# EAGLE board taser_ckt (EAGLE 9.6.2)
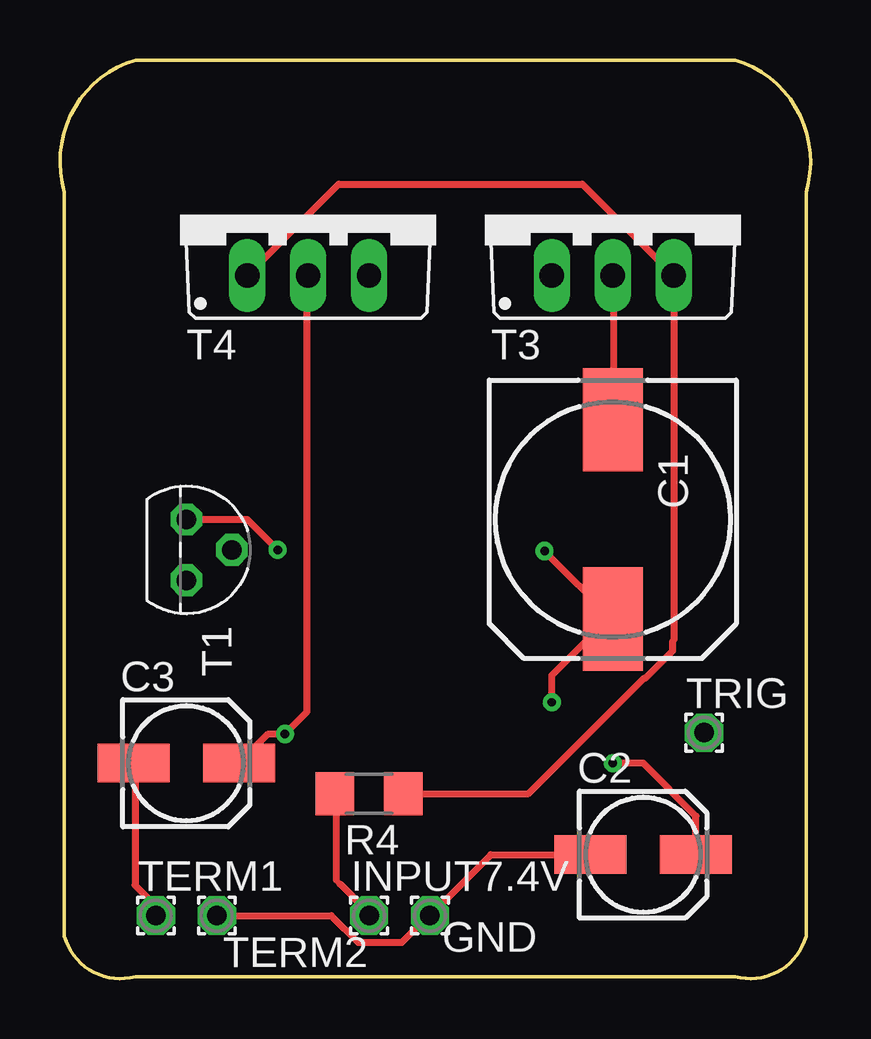
[diagram p0: board, top side]
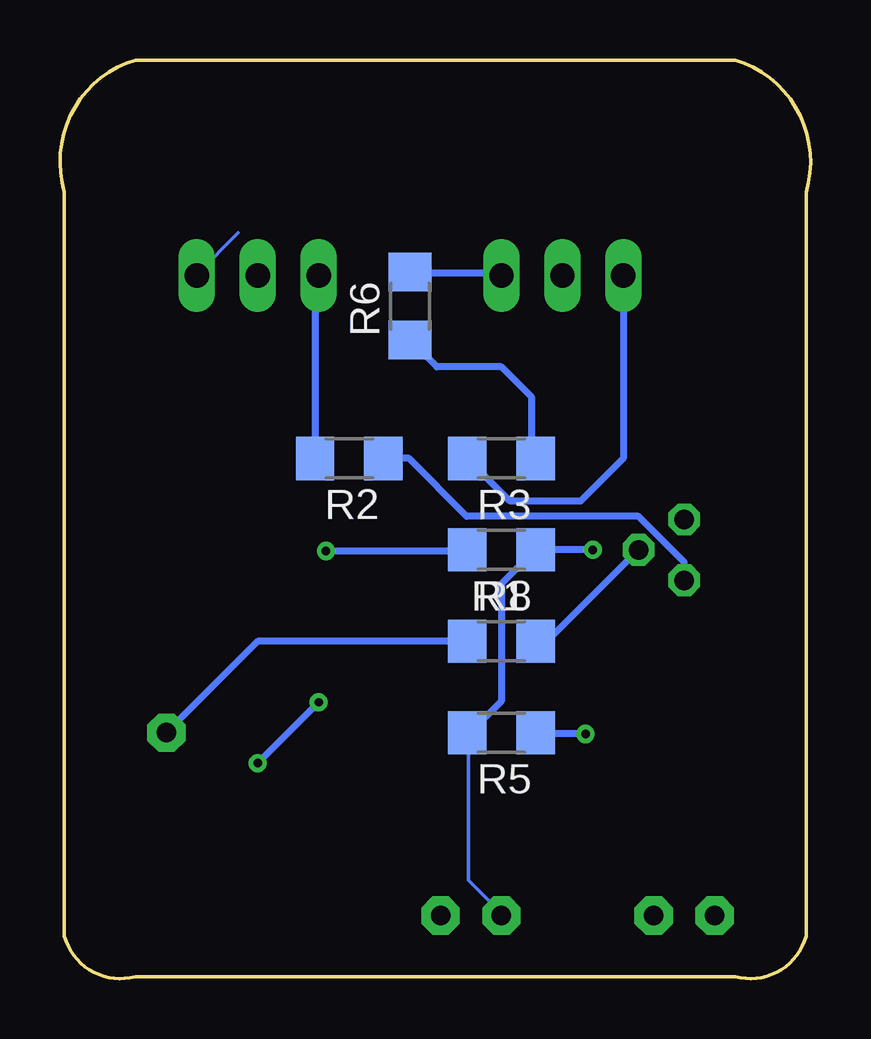
[diagram p1: board, bottom side, seen from below]

Size 31.29 x 38.28 mm. Coordinates in mm from the lower left corner, seen from the top.
Outline: 0.19,1.78 arc90 3.15,0.09 28.15,0.09 arc90 31.11,1.78 31.11,32.78 arc90 28.15,38.28 3.15,38.28 arc90 0.19,32.78 0.19,1.78
Copper layers (1*16): Top 0.035mm / dielectric 1.5mm / Bottom 0.035mm
Design rules "default": minimum track width 6mil, minimum drill 0.35mm, track to track 6mil, track to pad 6mil, pad to pad 6mil, via to via 6mil, smd to smd 6mil, copper to edge 40mil, drill to drill 6mil, minimum pad ring 10mil, minimum via ring 8mil, stop-mask expansion 4mil, vias tented up to drill 0mil, thermal gap 10mil

## Footprints (pad centres in the part's own frame; a part is rotated, then mirrored left to right if it is on the bottom)
150CLZ-1014 = smd 4.3 x 2.5: + 4.15,0; - -4.15,0
153CLV-0505 = smd 3 x 1.6: + 2.2,0; - -2.2,0
1,6/0,8 = drill 0.813 pad 1.6 octagon: 1 0,0
R1206 = smd 1.6 x 1.803: 1 -1.422,0; 2 1.422,0
TO92 = drill 0.813 octagon: 1 1.27,0; 2 0,1.905; 3 -1.27,0
TO220BV = drill 1.016 long: 1 -2.54,-2.54; 2 0,-2.54; 3 2.54,-2.54

## Placement (x,y rotation side)
C1  [150CLZ-1014]  23.05,19.14 270 top
C2  [153CLV-0505]  24.32,5.17 0 top
C3  [153CLV-0505]  5.27,8.98 0 top
GND  [1,6/0,8]  15.43,2.63 0 top
INPUT7.4V  [1,6/0,8]  12.89,2.63 0 top
R1  [R1206]  12.89,14.06 0 bottom
R2  [R1206]  19.24,21.68 180 bottom
R3  [R1206]  12.89,21.68 180 bottom
R4  [R1206]  12.89,7.71 180 top
R5  [R1206]  12.89,10.25 180 bottom
R6  [R1206]  16.7,28.03 90 bottom
R8  [R1206]  12.89,17.87 180 bottom
T1  BC547  [TO92]  5.27,17.87 270 top
T3  2SC1306  [TO220BV]  23.05,31.84 0 top
T4  2SC1306  [TO220BV]  10.35,31.84 0 top
TERM1  [1,6/0,8]  4,2.63 0 top
TERM2  [1,6/0,8]  6.54,2.63 0 top
TRIG  [1,6/0,8]  26.86,10.25 0 top

## Library data of the parts
C1-C3 = rcl; SPICEPREFIX: C
GND INPUT7.4V TERM1 TERM2 TRIG = wirepad
R1-R6 R8 = rcl; SPICEPREFIX: R
T1 = transistor
T3 T4 = transistor-neu-to92

## Nets
GND: C2.- GND.1 TERM2.1
N$1: R2.2 T3.1
N$2: C1.+ C2.+ R8.2
N$3: R2.1 T1.1
N$4: C1.- T3.2
N$5: R3.2 R4.1 T3.3 T4.1
N$7: C3.+ R5.1 T4.2
N$8: R6.2 T4.3
N$9: R3.1 R6.1
N$10: C3.- TERM1.1
N$11: R1.1 TRIG.1
N$12: R1.2 T1.2
VCC: INPUT7.4V.1 R4.2 R5.2 R8.1 T1.3

## Tracks (layer width: path | path; a pad name or v marks a point on that pad's centre or on a via)
GND
  Top 0.152: 21.78,5.17 C2.- | 15.32,2.57 GND.1
  Top 0.3: TERM2.1 11.31,2.63 12.43,1.51 14.26,1.51 15.32,2.57 | GND.1 17.97,5.17 21.78,5.17
N$1
  Bottom 0.3: T3.1 20.66,29.14 R2.2
N$2  (via drill 0.35)
  Top 0.152: 22.94,15.07 C1.+
  Top 0.3: C2.+ 26.52,6.78 24.32,8.98 v23.05,8.98 | v20.51,11.52 20.51,12.63 22.94,15.07 | v20.2,17.81 23.03,14.99 C1.+
  Bottom 0.3: v23.05,8.98 v20.51,11.52 | R8.2 14.36,17.81 v20.2,17.81
N$3
  Bottom 0.3: T1.1 5.27,17.36 7.17,19.26 14.33,19.26 16.75,21.68 R2.1
N$4
  Top 0.152: 23.1,29.24 T3.2
  Top 0.3: C1.- 23.1,23.34 23.1,29.24
N$5
  Top 0.3: T4.1 11.62,33.11 21.78,33.11 T3.3 25.59,14.11 25.54,14.06 25.54,13.65 24.42,12.53 24.37,12.53 19.54,7.71 R4.1
  Bottom 0.152: 14.26,21.62 R3.2 14.41,21.78 14.41,22.23 | 7.86,29.24 T4.1 | 23.86,31.07 25.54,29.4 T3.3
  Bottom 0.3: T4.1 7.81,21.68 9.58,19.9 12.53,19.9 14.26,21.62
N$7  (via drill 0.35)
  Top 0.152: 10.3,29.24 T4.2
  Top 0.3: C3.+ 8.69,10.19 v9.38,10.19 10.3,11.11 10.3,29.24
  Bottom 0.3: v9.38,10.19 11.41,10.19 R5.1
N$8
  Bottom 0.152: 16.7,29.4 R6.2 | 12.89,29.4 T4.3
  Bottom 0.3: T4.3 12.99,29.4 16.7,29.4
N$9
  Bottom 0.152: 11.97,21.78 11.51,21.78 R3.1 | 16.7,26.5 R6.1
  Bottom 0.3: R3.1 11.62,21.83 11.62,24.22 12.89,25.49 15.58,25.49 R6.1
N$10
  Top 0.3: C3.- 3.13,8.91 3.13,3.9 4,3.03 TERM1.1
N$11
  Bottom 0.3: R1.1 23.05,14.06 TRIG.1
N$12
  Bottom 0.3: T1.2 10.98,14.06 R1.2
VCC  (via drill 0.35)
  Top 0.152: 11.51,4.1 11.67,3.95
  Top 0.3: T1.3 7.81,19.14 v9.08,17.87 | R4.2 11.51,7.66 11.51,4.1 | 11.67,3.95 12.89,2.73 INPUT7.4V.1
  Bottom 0.152: INPUT7.4V.1 12.89,2.73 14.26,4.1 14.26,7.71 14.26,10.19 R5.2 14.26,10.35 | 11.51,17.81 R8.1
  Bottom 0.3: v9.08,17.87 R8.1 | R8.1 11.51,17.81 | R8.1 12.89,16.44 12.89,11.57 14.26,10.19